# EAGLE board opjinletplatev5_v5 (EAGLE 9.7.0)

Size 40 x 16 mm. Coordinates in mm from the lower left corner, seen from the top.
Outline: 40,0 40,16 0,16 0,0 40,0
Copper layers (1*16): Top / Bottom
Stack-up Default Layer Stack: Top User Defined 0.035mm / Dielectric-1 User Defined 1.5mm / Bottom User Defined 0.035mm
Design rules "default *": minimum track width 6mil, minimum drill 0.35mm, track to track 6mil, track to pad 6mil, pad to pad 6mil, via to via 6mil, smd to smd 6mil, copper to edge 20mil, drill to drill 4mil, minimum pad ring 10mil, minimum via ring 8mil, stop-mask expansion 4mil, vias tented up to drill 0mil, thermal gap 10mil
Holes 2.3 mm at 33.97,3.58 20,3.58 6.03,3.58 33.97,12.47 6.03,12.47 20,12.47

## Footprints (pad centres in the part's own frame; a part is rotated, then mirrored left to right if it is on the bottom)
STANDOFF_HEX_FEMALE_400X1000_M2X0.4_MTGP600H220 = drill 2.2 pad 6: 1 0,0 | hole 2.2: 0,0

## Placement (x,y rotation side)
E$1  [STANDOFF_HEX_FEMALE_400X1000_M2X0.4_MTGP600H220]  3.74,8 0 top
E$3  [STANDOFF_HEX_FEMALE_400X1000_M2X0.4_MTGP600H220]  36.26,8 0 top

## Library data of the parts
E$1 E$3 = PCB-Fasteners_Hardware

## Text on the board
Top: OPJ Printhead Gen 4 | Serial # | #2-56 X 1/4" Socket Head Cap Screws